# Altium PCB PCB1.PcbDoc
Units mm, origin at the board's own origin, x right, y up, seen from the top; angles counter-clockwise.
Board outline 108.2 x 95.17 mm, 2 copper layers (Top Layer, Bottom Layer); 76 components, 69 nets, 245 pads, 32 vias.
Unrouted connection lines stored in the file: 167.
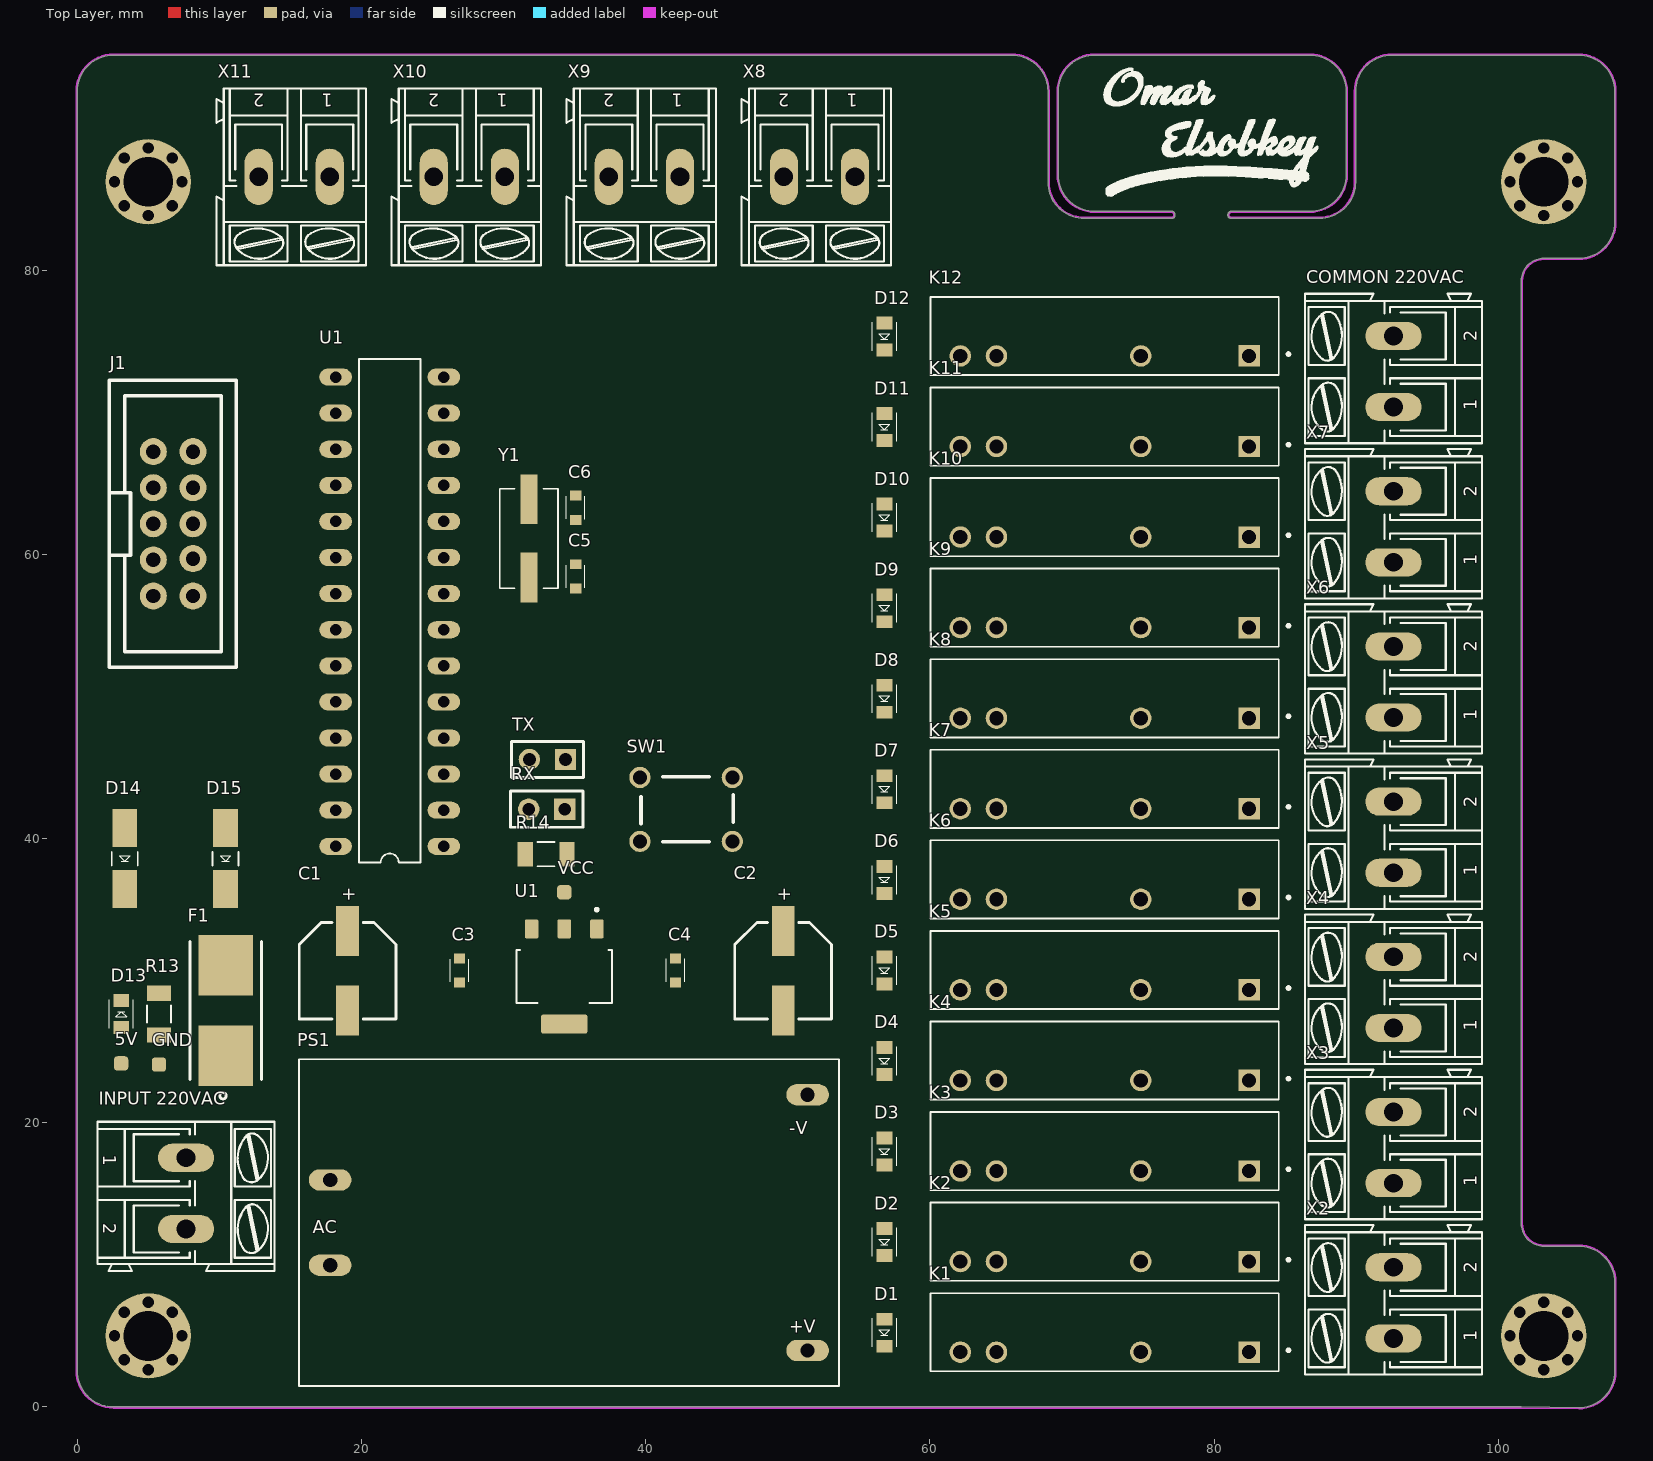
[diagram p0: Top Layer view]
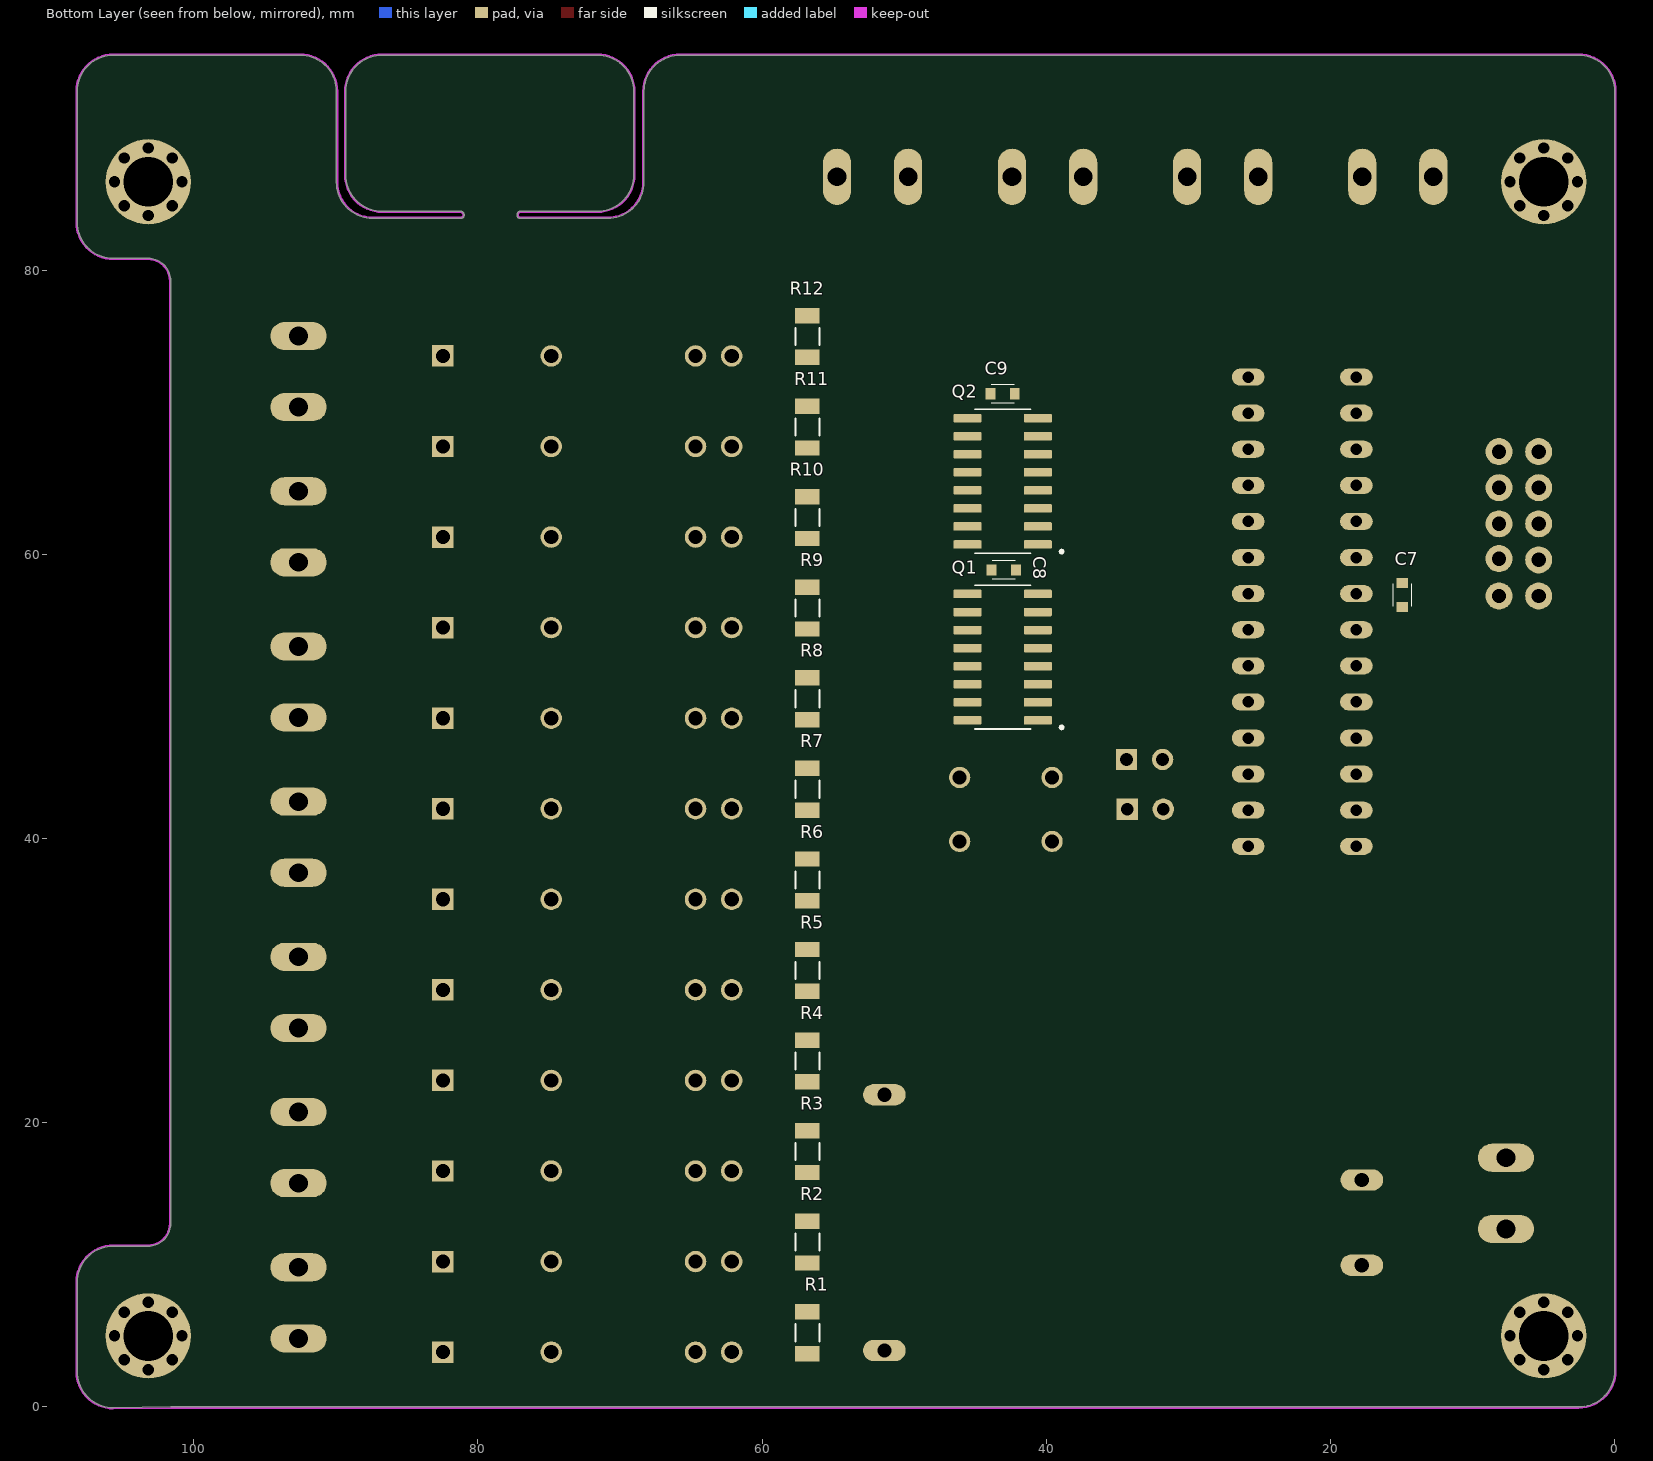
[diagram p1: Bottom Layer view, seen from below]

## Layer stack, top to bottom
Top Solder: solder mask 0.0102, Solder Resist, Dk 3.5
Top Layer: signal copper 0.0356
Dielectric 1: dielectric 0.32, FR-4, Dk 4.8
Bottom Layer: signal copper 0.0356
Bottom Solder: solder mask 0.0102, Solder Resist, Dk 3.5

## Board outline
108.2,83.366 cw(c105.66,83.366) 105.66,80.826 103.2,80.826 ccw(c103.2,79.251) 101.625,79.251 101.625,12.897 ccw(c103.2,12.897) 103.2,11.322 105.66,11.322 cw(c105.66,8.782) 108.2,8.782 108.2,2.49 cw(c105.66,2.49) 105.66,-0.05 101.6,0 2.54,0 cw(c2.54,2.54) 0,2.54 0,92.585 cw(c2.54,92.585) 2.54,95.125 65.777,95.125 cw(c65.777,92.585) 68.317,92.585 68.317,86.19 ccw(c70.857,86.19) 70.857,83.65 77.025,83.65 ccw(c77.025,83.875) 77.25,83.875 77.25,83.9 ccw(c77,83.9) 77,84.15 71.578,84.15 cw(c71.578,86.69) 69.038,86.69 69.038,92.585 cw(c71.578,92.585) 71.578,95.125 86.76,95.125 cw(c86.76,92.585) 89.3,92.585 89.3,86.69 cw(c86.76,86.69) 86.76,84.15 81.25,84.15 ccw(c81.25,83.875) 80.975,83.875 ccw(c81.2,83.875) 81.2,83.65 87.418,83.65 ccw(c87.418,86.19) 89.958,86.19 89.958,92.585 cw(c92.497,92.585) 92.498,95.125 94.08,95.125 105.66,95.125 cw(c105.66,92.585) 108.2,92.585

## Design rules (kind name [scope] priority, off if disabled: settings)
Clearance [All] p1: gap=0.254 ignorepadtopadclearanceinfootprint=FALSE except(0.381: Arc-THPad Track-THPad; 0.508: Arc-Arc Arc-Track Track-Track)
PolygonConnect [All] p1: connectstyle=Relief reliefconductorwidth=0.254 reliefentries=4 polygonreliefangle="90 Angle" airgapwidth=0.254
RoutingVias [All] p1: holewidth=0.61 width=0.859 viastyle="Through Hole" minholewidth=0.61 minwidth=0.859 maxholewidth=0.8 maxwidth=0.859
SolderMaskExpansion [All] p1: expansion=0.102 istentingtop=FALSE
Width [All] p1: maxlimit=0.813 minlimit=0.406 preferedwidth=0.406 minimp=50.000000 maximp=50.000000 favimp=50.000000
30 further rules are at their usual default settings.

## Components (designator, comment, footprint, x,y, rotation, side; value= is the part's Value field where it differs from the comment)
5V "TEST POINT" "Test point" 3.088,24.175 r90 top
C1 "Electrolyt Cap" D6.3H7.7 19.025,30.696 r90 top
C2 "Electrolyt Cap" D6.3H7.7 49.675,30.696 r90 top
C3 "Ceramic Cap" 0603_WAVE 26.9,30.725 r90 top
C4 "Ceramic Cap" 0603_WAVE 42.1,30.725 r270 top
C5 "Ceramic Cap" 0603_WAVE 35.081,58.453 r90 top
C6 "Ceramic Cap" 0603_WAVE 35.081,63.279 r270 top
C7 "Ceramic Cap" 0603_WAVE 14.95,57.15 r90 bottom
C8 "Ceramic Cap" 0603_WAVE 43,58.9 r0 bottom
C9 "Ceramic Cap" 0603_WAVE 43.075,71.3 r0 bottom
"COMMON 220VAC" "AK300/2" AK300/2 92.627,75.364 r90 top
D1 "1.5mW/sr, 1.4V" 0805_L2W1.3H0.8 56.813,5.228 r90 top
D2 "1.5mW/sr, 1.4V" 0805_L2W1.3H0.8 56.813,11.601 r90 top
D3 "1.5mW/sr, 1.4V" 0805_L2W1.3H0.8 56.813,17.974 r90 top
D4 "1.5mW/sr, 1.4V" 0805_L2W1.3H0.8 56.813,24.348 r90 top
D5 "1.5mW/sr, 1.4V" 0805_L2W1.3H0.8 56.813,30.721 r90 top
D6 "1.5mW/sr, 1.4V" 0805_L2W1.3H0.8 56.813,37.094 r90 top
D7 "1.5mW/sr, 1.4V" 0805_L2W1.3H0.8 56.813,43.467 r90 top
D8 "1.5mW/sr, 1.4V" 0805_L2W1.3H0.8 56.813,49.84 r90 top
D9 "1.5mW/sr, 1.4V" 0805_L2W1.3H0.8 56.813,56.213 r90 top
D10 "1.5mW/sr, 1.4V" 0805_L2W1.3H0.8 56.813,62.586 r90 top
D11 "1.5mW/sr, 1.4V" 0805_L2W1.3H0.8 56.813,68.959 r90 top
D12 "1.5mW/sr, 1.4V" 0805_L2W1.3H0.8 56.813,75.332 r90 top
D13 "1.5mW/sr, 1.4V" 0805_L2W1.3H0.8 3.088,27.646 r270 top
D14 "M7 Diode" SMA 3.341,38.596 r270 top
D15 "M7 Diode" SMA 10.435,38.596 r270 top
F1 "Fuse" FUSE 10.454,27.9 r90 top
GND "TEST POINT" "Test point" 5.755,24.1 r90 top
"INPUT 220VAC" "AK300/2" AK300/2 7.66,12.533 r270 top
J1 "SPI" idc10 6.75,62.15 r0 top
K1 "Solid State SPST" "SOLID STATE SPST" 72.307,5.26 r180 top
K2 "Solid State SPST" "SOLID STATE SPST" 72.307,11.633 r180 top
K3 "Solid State SPST" "SOLID STATE SPST" 72.307,18.006 r180 top
K4 "Solid State SPST" "SOLID STATE SPST" 72.307,24.379 r180 top
K5 "Solid State SPST" "SOLID STATE SPST" 72.307,30.752 r180 top
K6 "Solid State SPST" "SOLID STATE SPST" 72.307,37.125 r180 top
K7 "Solid State SPST" "SOLID STATE SPST" 72.307,43.499 r180 top
K8 "Solid State SPST" "SOLID STATE SPST" 72.307,49.872 r180 top
K9 "Solid State SPST" "SOLID STATE SPST" 72.307,56.245 r180 top
K10 "Solid State SPST" "SOLID STATE SPST" 72.307,62.618 r180 top
K11 "Solid State SPST" "SOLID STATE SPST" 72.307,68.991 r180 top
K12 "Solid State SPST" "SOLID STATE SPST" 72.307,75.364 r180 top
PS1 "HLK-5M05" HLK-5M05 34.6,12.975 r0 top
Q1 "ULN2003AD" SOIC127P600X175-16N 43.075,52.767 r0 bottom
Q2 "ULN2003AD" SOIC127P600X175-16N 43.075,65.14 r0 bottom
R1 "1206 Res" 1206 56.813,5.228 r270 bottom value=1k
R2 "1206 Res" 1206 56.813,11.601 r270 bottom value=1k
R3 "1206 Res" 1206 56.813,17.974 r270 bottom value=1k
R4 "1206 Res" 1206 56.813,24.348 r270 bottom value=1k
R5 "1206 Res" 1206 56.813,30.721 r270 bottom value=1k
R6 "1206 Res" 1206 56.813,37.094 r270 bottom value=1k
R7 "1206 Res" 1206 56.813,43.467 r270 bottom value=1k
R8 "1206 Res" 1206 56.813,49.84 r270 bottom value=1k
R9 "1206 Res" 1206 56.813,56.213 r270 bottom value=1k
R10 "1206 Res" 1206 56.813,62.586 r270 bottom value=1k
R11 "1206 Res" 1206 56.813,68.959 r270 bottom value=1k
R12 "1206 Res" 1206 56.813,75.332 r270 bottom value=1k
R13 "1206 Res" 1206 5.755,27.646 r270 top value=1k
R14 "1206 Res" 1206 33,38.9 r0 top value=10k
RX "Header 2" HDR1X2 34.311,42.067 r180 top
SW1 "6x4mm Pb" "6X4MM PB" 42.85,42.05 r0 top
TX "Header 2" HDR1X2 34.361,45.567 r180 top
U1 "AMS1117" SOT229P700X180-4N 34.273,30.295 r270 top
U1 "ATMEGA328P-PN" DIL28 21.99,55.965 r180 top
VCC "TEST POINT" "Test point" 34.273,36.225 r90 top
X2 "AK300/2" AK300/2 92.627,9.832 r90 top
X3 "AK300/2" AK300/2 92.627,20.754 r90 top
X4 "AK300/2" AK300/2 92.627,31.676 r90 top
X5 "AK300/2" AK300/2 92.627,42.598 r90 top
X6 "AK300/2" AK300/2 92.627,53.52 r90 top
X7 "AK300/2" AK300/2 92.627,64.442 r90 top
X8 "AK300/2" AK300/2 49.727,86.568 r180 top
X9 "AK300/2" AK300/2 37.408,86.568 r180 top
X10 "AK300/2" AK300/2 25.089,86.568 r180 top
X11 "AK300/2" AK300/2 12.77,86.568 r180 top
Y1 "ECS-160-20-3X-TR" XTAL_ECS-160-20-3X-TR 31.779,61.12 r270 top

## Footprints (in the part's own frame and the unit in brackets; to place one, negate y for a bottom-side part, rotate by r counter-clockwise, add the part's x,y. Pads: shape width x height; smd on the part's side, far side on the other; paste and mask are expansions set on the pad)
"6X4MM PB" [mm]
  round 1.498 hole 0.99: 1(-3.25,2.25) 2(3.25,2.25) 3(-3.25,-2.25) 4(3.25,-2.25)
  silkscreen extent -3.17,-2.27 3.3,2.29, body extent -3.9,-3 3.9,3, height 17.01
0603_WAVE [mm] "Ceramic Capacitors, 0603, body 1.6x0.8mm"
  rect 0.7x0.8 smd: 1(-0.85,0) 2(0.85,0)
  silkscreen extent -0.81,-0.65 0.8,0.65, body extent -0.8,-0.4 0.8,0.4, height 0.8
0805_L2W1.3H0.8 [mm] "SMT Infrared Chip LED Waterclear, body 2x1.3mm"
  rect 0.9x1.1 smd: 1(-0.95,0) 2(0.95,0)
  silkscreen extent -1,-0.85 1,0.85, body extent -1,-0.65 1,0.65, height 0.8
1206 [mm]
  rect 1.08x1.72 smd: 1(-1.47,0) 2(1.47,0)
  silkscreen extent -0.61,-0.85 0.61,0.85, body extent -1.6,-0.8 1.6,0.8, height 0.71
AK300/2 [mil]
  oval 78x156 hole 52: 1(-197,0) 2(0,0)
  silkscreen extent -297,-245 117,245, body extent -319,-157 98,197, height 496
D6.3H7.7 [mm] "Aluminium Electrolytic V-Chip SMT Capacitors, 6.3x7.7mm"
  rect 3.5x1.6 smd: 1(2.8,0) 2(-2.8,0)
  silkscreen extent -3.4,-3.4 3.4,3.4, body extent -3.65,-3.3 3.65,3.3, height 7.7
DIL28 [mm]
  oval 2.3x1.2 hole 0.813: 1(-3.81,16.51) 2(-3.81,13.97) 3(-3.81,11.43) 4(-3.81,8.89) 5(-3.81,6.35) 6(-3.81,3.81) 7(-3.81,1.27) 8(-3.81,-1.27) 9(-3.81,-3.81) 10(-3.81,-6.35) 11(-3.81,-8.89) 12(-3.81,-11.43) 13(-3.81,-13.97) 14(-3.81,-16.51) 15(3.81,-16.51) 16(3.81,-13.97) 17(3.81,-11.43) 18(3.81,-8.89) 19(3.81,-6.35) 20(3.81,-3.81) 21(3.81,-1.27) 22(3.81,1.27) 23(3.81,3.81) 24(3.81,6.35) 25(3.81,8.89) 26(3.81,11.43) 27(3.81,13.97) 28(3.81,16.51)
  silkscreen extent -2.16,-17.78 2.16,17.65, body extent -3.81,-17.75 4.06,17.65, height 5.2
FUSE [mm]
  rect 4.24x3.81 smd: 1(-3.19,0) 2(3.19,0)
  silkscreen extent -6.22,-2.51 4.86,2.51, body extent -4.86,-2.64 4.87,2.39, height 3.81
HDR1X2 [mm] "Connector; Header; 2 Position"
  rect 1.5x1.5 hole 0.9: 1(0,0)
  round 1.5 hole 0.9: 2(2.54,0)
  silkscreen extent -1.27,-1.27 3.81,1.27
HLK-5M05 [mm]
  oval 3x1.5 hole 1: 1(-16.8,3) 2(-16.8,-3) 3(16.8,9) 4(16.8,-9)
  silkscreen extent -19,-11.5 19,11.5, body extent -19,-11.5 19,11.5, height 18
idc10 [mm]
  round 1.9 hole 1.016 unplated: 1(-1.397,5.08) 2(1.397,5.08) 3(-1.397,2.54) 4(1.397,2.54) 5(-1.397,0) 6(1.397,0) 7(-1.397,-2.54) 8(1.397,-2.45) 9(-1.397,-5.08) 10(1.397,-5.08)
  silkscreen extent -4.5,-10.1 4.45,10.1, body extent -4.57,-10.1 4.43,10.1, height 10
SMA [mm]
  rect 2.65x1.75 smd: ANNODE(-2.15,0) CATHODE(2.15,0)
  silkscreen extent -0.48,-0.91 0.48,0.91, body extent -2.6,-1.36 2.6,1.36, height 2.7
SOIC127P600X175-16N [mm]
  rrect25% 1.97x0.6 smd: 1(-2.475,4.445) 2(-2.475,3.175) 3(-2.475,1.905) 4(-2.475,0.635) 5(-2.475,-0.635) 6(-2.475,-1.905) 7(-2.475,-3.175) 8(-2.475,-4.445) 9(2.475,-4.445) 10(2.475,-3.175) 11(2.475,-1.905) 12(2.475,-0.635) 13(2.475,0.635) 14(2.475,1.905) 15(2.475,3.175) 16(2.475,4.445)
  silkscreen extent -4.24,-5.06 1.95,5.06, body extent -3,-4.95 3,4.95, height 1.75
"SOLID STATE SPST" [mm]
  rect 1.508x1.508 hole 1: 1(-10.16,1.4)
  round 1.508 hole 1: 2(-2.54,1.4) 3(7.62,1.4) 4(10.16,1.4)
  silkscreen extent -13.03,-2.75 12.25,2.75, body extent -12.31,-2.62 12.19,2.88, height 20.5
SOT229P700X180-4N [mm]
  rrect15% 1.31x0.93 smd: 1(-3.345,2.29) 2(-3.345,0) 3(-3.345,-2.29)
  rrect15% 1.31x3.24 smd: 4(3.345,0)
  silkscreen extent -4.8,-3.36 1.86,3.36, body extent -3.5,-3.25 3.5,3.25, height 1.75
"Test point" [mil]
  rrect50% 40x40 smd: TP(0,0)
XTAL_ECS-160-20-3X-TR [mm]
  rect 3.5x1.2 smd: 1(-2.75,0) 2(2.75,0)
  silkscreen extent -3.5,-2.05 3.5,2.05, body extent -3.82,-2.07 3.78,2.03, height 2.3

## Part data
C1 C2: "WCAP-ASLI Aluminum Electrolytic Capacitor, V-Chip, SMT, D16xH17mm", Capacitance=47uF, Capacitance Tolerance=+/-20%, Leakage Current=428.4uA, Manufacturer="Wurth Elektronik", Manufacturer Part Number=865080163018, Operating Temperature="-55 to +105degC", Rated Voltage=25VDC, Ripple Current=1250mA, ComponentLink1Description=Manufacturer, ComponentLink1URL=http://www.we-online.de, ComponentLink2Description=Datasheet, ComponentLink2URL=https://www.we-online.com/catalog/datasheet/865080163018.pdf, Diameter=16mm, Dissipation Factor=24%, Endurance=2000h, Height=17mm, Mounting Technology=SMT, Packaging="Tape and Reel", Published Date="October 2020", Technical Reference=ASEK170682M6R3DVCTHB000
C3 C4 C7 C8 C9: "WCAP-CSGP Multilayer Ceramic Chip Capacitor, General Purpose, size 1812, X7R", Capacitance=100nF, Capacitance Tolerance=+/-10%, Isolation Resistance=>=10GOhm, Manufacturer="Wurth Elektronik", Manufacturer Part Number=885012210019, Operating Temperature="-55 to +125degC", Rated Voltage=50VDC, Ceramic Type=X7R, ComponentLink1Description=Manufacturer, ComponentLink1URL=http://www.we-online.de, ComponentLink2Description=Datasheet, ComponentLink2URL=https://www.we-online.com/catalog/datasheet/885012210019.pdf, Dissipation Factor=#NAME?, Height=1.25mm, Mounting Technology=SMT, Packaging="Tape and Reel", Published Date="May 2020", Size=1812, Technical Reference=X7R1812103K050DFCT10000
C5 C6: "WCAP-CSGP Multilayer Ceramic Chip Capacitor, General Purpose, size 1812, X7R", Capacitance=22pF, Capacitance Tolerance=+/-10%, Isolation Resistance=>=10GOhm, Manufacturer="Wurth Elektronik", Manufacturer Part Number=885012210019, Operating Temperature="-55 to +125degC", Rated Voltage=50VDC, Ceramic Type=X7R, ComponentLink1Description=Manufacturer, ComponentLink1URL=http://www.we-online.de, ComponentLink2Description=Datasheet, ComponentLink2URL=https://www.we-online.com/catalog/datasheet/885012210019.pdf, Dissipation Factor=#NAME?, Height=1.25mm, Mounting Technology=SMT, Packaging="Tape and Reel", Published Date="May 2020", Size=1812, Technical Reference=X7R1812103K050DFCT10000
"COMMON 220VAC" "INPUT 220VAC" X2 X3 X4 X5 X6 X7 X8 X9 X10 X11: Package=None, Availability=Unavailable, Check_prices=https://www.snapeda.com/parts/AK300/3/Altech/view-part/2748485/?ref=eda, MF=Altech, MP=AK300/3, Price=None, SnapEDA_Link=https://www.snapeda.com/parts/AK300/3/Altech/view-part/2748485/?ref=snap
D1 D2 D3 D4 D5 D6 D7 D8 D9 D10 D11 D12 D13: library part "0805 Led", "WL-SICW SMT Chip LED Infrared Waterclear, size 0805, 1.5mW/sr, 1.4V", Emitting Color=Infrared, Forward Voltage max.=2V, Forward Voltage typ.=1.4V, Manufacturer="Wurth Elektronik", Manufacturer Part Number=15408085BA400, Operating Temperature="-40 to +85degC", Centroid Wavelength typ.=845nm, Chip Technology=AlGaAs, ComponentLink1Description=Manufacturer, ComponentLink1URL=http://www.we-online.de, ComponentLink2Description=Datasheet, ComponentLink2URL=https://www.we-online.com/catalog/datasheet/15408085BA400.pdf, Mounting Technology=SMT, Packaging="Tape and Reel", Peak Wavelength typ.=850nm, Published Date="August 2020", Radiant Intensity min.=0.6mW/sr, Radiant Intensity typ.=1.5mW/sr, Size=0805, Viewing Angle=140deg
D14 D15: "Diode Standard 400V 1A Surface Mount SMA _DO-214AC_", Package="DO-214AC ON Semiconductor", Availability=Unavailable, MF="ON Semiconductor", MP=S1G, Price=None, SnapEDA_Link=https://www.snapeda.com/parts/S1G/ON%20Semiconductor/view-part/1474196/?ref=snap
F1: "4A 125V AC 125V DC Fuse Board Mount _Cartridge Style Excluded_ Holder, Surface Mount 2-SMD, Square End Block with Holder", Package="SMD-2 Littelfuse", Digi-Key_Part_Number=F1227CT-ND, Digi-Key_Purchase_URL=https://www.digikey.com/product-detail/en/littelfuse-inc/0154004.DR/F1227CT-ND/183376?utm_source=snapeda&utm_medium=aggregator&utm_campaign=symbol, MF="Littelfuse Inc.", MP=0154004.DR, SnapEDA_Link=https://www.snapeda.com/parts/0154004.DR/Littelfuse%20Inc./view-part/1215896/?ref=snap
K1 K2 K3 K4 K5 K6 K7 K8 K9 K10 K11 K12: "Solid State SPST-NO (1 Form A) 4-SIP", Package="SIP-4 Omron", Availability=Unavailable, MF="Omron Automation", MP="G3MB-202P DC5", Price=None, SnapEDA_Link=https://www.snapeda.com/parts/G3MB-202P%20DC5/Omron%20Automation%20and%20Safety/view-part/914581/?ref=snap
PS1: "AC DC 220V to 5V 5W 5Watt Isolated Switching Step-Down Power Supply Module Converter", Package="Package Analog Devices", Availability=Unavailable, MF=Hi-link, MP=HLK-5M05, Price=None, SnapEDA_Link=https://www.snapeda.com/parts/HLK-5M05/Hi-link/view-part/2758659/?ref=snap
Q1 Q2: "High-Voltage, High-Current Darlington Transistor Arrays", Package="SOIC-16 Texas Instruments", Arrow_Electronics-Purchase-URL=https://snapeda.com/shop?store=Arrow+Electronics&id=152260, Availability=Unavailable, DigiKey-Purchase-URL=https://snapeda.com/shop?store=DigiKey&id=152260, MF="Texas Instruments", Mouser-Purchase-URL=https://snapeda.com/shop?store=Mouser&id=152260, MP=ULN2003AD, Price=None, SnapEDA_Link=https://www.snapeda.com/parts/ULN2003AD/Texas%20Instruments/view-part/152260/?ref=snap
R1 R2 R3 R4 R5 R6 R7 R8 R9 R10 R11 R12 R13 R14: "Res 1206 10 Ohm 5% 1/8W Â±500ppm/Â°C Molded SMD SMD T/R", Package=1206, Power_Rating=".125 W", Resistance=10, Tolerance=5%, Availability=Warning, DigiKey-Purchase-URL=https://snapeda.com/shop?store=DigiKey&id=988597, EU_RoHS_Compliance="Compliant with Exemptions", MF="TE Connectivity", Mouser-Purchase-URL=https://snapeda.com/shop?store=Mouser&id=988597, MP=FCR1206J10R, Price=None, SnapEDA_Link=https://www.snapeda.com/parts/FCR1206J10R/TE%20Connectivity%20Passive%20Product/view-part/988597/?ref=snap
RX TX: "Header, 2-Pin", LatestRevisionDate=17-Jul-2002, LatestRevisionNote="Re-released for DXP Platform.", Publisher="Altium Limited"
SW1: "Switch Push Button OFF _ON_ SPST Round Button 0.05A 24VDC Momentary Contact PC Pins Thru-Hole", Package=None, Availability=Unavailable, EU_RoHS_Compliance=Compliant, MF="TE Connectivity", MP=3-1825910-1, Price=None, SnapEDA_Link=https://www.snapeda.com/parts/3-1825910-1/TE%20Connectivity%20ALCOSWITCH%20Switches/view-part/452461/?ref=snap, TE_purchase_URL=https://www.te.com/usa-en/product-3-1825910-1.html?te_bu=Cor&te_type=disp&te_campaign=seda_glo_cor-seda-global-disp-prtnr-fy19-seda-model-bom-cta_sma-317_1&elqCampaignId=32493
U1: "UNO PLUS Arduino R3 Shield, Xbee Arduino IDE Wheeled Robotics Kit", Package="SOT-223 Seeed Technology", Availability=Unavailable, MF="Seeed Technology", MP=AMS1117, Price=None, SnapEDA_Link=https://www.snapeda.com/parts/AMS1117/Seeed%20Technology%20Co.%2C%20Ltd/view-part/184428/?ref=snap
U1: "AVR AVRÂ® ATmega Microcontroller IC 8-Bit 20MHz 32KB _16K x 16_ FLASH 28-PDIP", Package="PDIP-28 Atmel", Availability=Unavailable, MF=Microchip, MP=ATMEGA328P-PN, Price=None, SnapEDA_Link=https://www.snapeda.com/parts/ATMEGA328P-PN/Microchip/view-part/396640/?ref=snap
Y1: "16MHz Â±30ppm Crystal 20pF 50 Ohms HC-49/US", Package="HC49/US ECS International", Digi-Key_Part_Number=XC1776CT-ND, Digi-Key_Purchase_URL=https://www.digikey.com/product-detail/en/ecs-inc/ECS-160-20-3X-TR/XC1776CT-ND/2676640?utm_source=snapeda&utm_medium=aggregator&utm_campaign=symbol, MF="ECS Inc.", MP=ECS-160-20-3X-TR, SnapEDA_Link=https://www.snapeda.com/parts/ECS-160-20-3X-TR/ECS%20Inc./view-part/561589/?ref=snap

## Free pads (board coordinates)
  round 6 hole 3.5 unplated: 1(5,5) 1(5,86.217) 1(103.2,5) 1(103.2,86.217)

## Via types
v1: diameter 0.859, hole 0.8, Top Layer to Bottom Layer, 32 vias

## Nets (pads, with @x,y where several pads share a name; then routed paths per layer and width w, separated by ;. In a path a pad name is that pad's centre, name@x,y a point inside that pad or via, vN(x,y) a via of type N, cw(c..) or ccw(c..) an arc to the next point about the centre after c; other vN are vias at no path point)
0: RX.1 U1.2@25.8,41.995
1: TX.1 U1.3@25.8,44.535
2: Q1.3 U1.4@25.8,47.075
3: Q1.4 U1.5
4: Q1.5 U1.6
5: Q1.6 U1.11
6: Q1.7 U1.12
7: U1.13 X11.2
8: U1.14 X11.1
9: Q2.1 U1.15
10: Q2.2 U1.16
11: J1.1 Q2.3 U1.17
12: J1.9 Q2.4 U1.18
13: J1.7 Q2.5 U1.19
+5: 5V.TP C1.1 C3.2 C8.2 C9.2 D14.CATHODE D15.CATHODE F1.2 K1.3 K2.3 K3.3 K4.3 K5.3 K6.3 K7.3 K8.3 K9.3 K10.3 K11.3 K12.3 Q1.9 Q2.9 R1.2 R2.2 R3.2 R4.2 R5.2 R6.2 R7.2 R8.2 R9.2 R10.2 R11.2 R12.2 R13.1 U1.3@31.983,33.64 X8.2
A0: U1.23 X9.2
A1: U1.24 X9.1
A2: U1.25
A3: U1.26
A4: U1.27 X10.2
A5: U1.28 X10.1
COMMON: "COMMON 220VAC.1" "COMMON 220VAC.2" K1.2 K2.2 K3.2 K4.2 K5.2 K6.2 K7.2 K8.2 K9.2 K10.2 K11.2 K12.2
GND: C1.2 C2.2 C3.1 C4.1 C5.2 C6.2 C7.1 C8.1 C9.1 D13.1 D14.ANNODE D15.ANNODE GND.TP J1.4 J1.6 J1.8 J1.10 pad.1@5,5 PS1.3 Q1.8 Q2.8 SW1.1 SW1.2 U1.1@36.563,33.64 U1.8 U1.22 X8.1
  other v1: 5,2.625 3.321,3.321 6.679,3.321 2.625,5 7.375,5 3.321,6.679 6.679,6.679 5,7.375
K1: K1.1 X2.1
K2: K2.1 X2.2
K3: K3.1 X3.1
K4: K4.1 X3.2
K5: K5.1 X4.1
K6: K6.1 X4.2
K7: K7.1 X5.1
K8: K8.1 X5.2
K9: K9.1 X6.1
K10: K10.1 X6.2
K11: K11.1 X7.1
K12: K12.1 X7.2
NetD1_2: D1.2 R1.1
NetD2_2: D2.2 R2.1
NetD3_2: D3.2 R3.1
NetD4_2: D4.2 R4.1
NetD5_2: D5.2 R5.1
NetD6_2: D6.2 R6.1
NetD7_2: D7.2 R7.1
NetD8_2: D8.2 R8.1
NetD9_2: D9.2 R9.1
NetD10_2: D10.2 R10.1
NetD11_2: D11.2 R11.1
NetD12_2: D12.2 R12.1
NetD13_2: D13.2 R13.2
NetF1_1: F1.1 PS1.4
"NetINPUT 220VAC_1": "INPUT 220VAC.1" PS1.1
"NetINPUT 220VAC_2": "INPUT 220VAC.2" PS1.2
R1: D1.1 K1.4 Q1.16
R2: D2.1 K2.4 Q1.15
R3: D3.1 K3.4 Q1.14
R4: D4.1 K4.4 Q1.13
R5: D5.1 K5.4 Q1.12
R6: D6.1 K6.4 Q1.11
R7: D7.1 K7.4 Q1.10
R8: D8.1 K8.4 Q2.16
R9: D9.1 K9.4 Q2.15
R10: D10.1 K10.4 Q2.14
R11: D11.1 K11.4 Q2.13
R12: D12.1 K12.4 Q2.12
RST: J1.5 R14.1 SW1.3 SW1.4 U1.1@25.8,39.455
RX: Q1.1 RX.2
TX: Q1.2 TX.2
VCC: C2.1 C4.2 C7.2 J1.2 R14.2 U1.2@34.273,33.64 U1.4@34.273,26.95 U1.7 U1.20 VCC.TP
XTAL1: C5.1 U1.9 Y1.2
XTAL2: C6.1 U1.10 Y1.1
pads on no net: J1.3 Q2.6 Q2.7 Q2.10 Q2.11 U1.21
copper on no net:
  other v1: 103.2,2.625 101.52,3.321 104.879,3.321 100.825,5 105.575,5 101.52,6.679 104.879,6.679 103.2,7.375 5,83.842 103.2,83.842 3.321,84.537 6.679,84.537 101.52,84.537 104.879,84.537 2.625,86.217 7.375,86.217 100.825,86.217 105.575,86.217 3.321,87.896 6.679,87.896 101.52,87.896 104.879,87.896 5,88.592 103.2,88.592

## Keep-outs
Keep-Out Layer:
  lines w0.127: 101.599,-0.064 101.6,-0.064 ; -0.064,2.54 ccw(c0,2.54) -0.064,2.539 ; -0.064,2.539 ccw(c2.54,2.54) 2.539,-0.064 ; -0.064,2.54 ccw(c2.54,2.54) -0.064,2.539 ; -0.064,2.54 -0.064,92.585 ; -0.064,92.586 ccw(c2.54,92.585) -0.064,92.585 ; -0.064,92.586 cw(c2.54,92.585) 2.539,95.189 ; -0.064,92.586 ccw(c0,92.585) -0.064,92.585 ; 2.539,-0.064 ccw(c2.54,2.54) 2.54,-0.064 ; 2.539,-0.064 ccw(c2.54,0) 2.54,-0.064 ; 2.54,-0.064 101.6,-0.064 ; 2.54,95.189 ccw(c2.54,95.125) 2.539,95.189 ; 2.54,95.189 ccw(c2.54,92.585) 2.539,95.189 ; 2.54,95.189 65.777,95.189 ; 65.778,95.189 ccw(c65.777,95.125) 65.777,95.189 ; 65.778,95.189 ccw(c65.777,92.585) 65.777,95.189 ; 65.778,95.189 cw(c65.777,92.585) 68.381,92.586 ; 68.381,86.19 ccw(c68.317,86.19) 68.381,86.19 ; 68.381,86.19 ccw(c70.857,86.19) 70.857,83.714 ; 68.381,86.19 68.381,92.585 ; 68.381,86.19 68.381,86.19 ; 68.381,86.19 68.381,86.19 ; 68.381,92.585 ccw(c65.777,92.585) 68.381,92.586 ; 68.381,92.585 ccw(c68.317,92.585) 68.381,92.586 ; 68.974,86.69 ccw(c71.578,86.69) 71.578,84.086 ; 68.974,86.69 ccw(c69.038,86.69) 68.974,86.69 ; 68.974,86.69 68.974,92.585 ; 68.974,86.69 68.974,86.69 ; 68.974,86.69 68.974,86.69 ; 68.974,92.585 cw(c71.578,92.585) 71.577,95.189 ; 68.974,92.585 68.974,92.585 ; 70.857,83.714 ccw(c70.857,83.65) 70.857,83.714 ; 70.857,83.714 77.025,83.714 ; 70.857,83.714 70.857,83.714 ; 71.578,84.086 ccw(c71.578,84.15) 71.578,84.086 ; 71.578,84.086 76.999,84.086 ; 71.578,84.086 71.578,84.086 ; 71.578,84.086 71.578,84.086 ; 71.578,95.189 ccw(c71.578,95.125) 71.578,95.189 ; 71.578,95.189 ccw(c71.578,95.125) 71.577,95.189 ; 71.578,95.189 ccw(c71.578,92.585) 71.577,95.189 ; 71.578,95.189 86.76,95.189 ; 76.999,84.086 ccw(c77,84.15) 77,84.086 ; 76.999,84.086 77,84.086 ; 77,84.086 cw(c77,83.9) 77.186,83.9 ; 77.025,83.714 ccw(c77.025,83.875) 77.186,83.875 ; 77.025,83.714 ccw(c77.025,83.875) 77.025,83.714 ; 77.025,83.714 ccw(c77.025,83.65) 77.025,83.714 ; 77.025,83.714 ccw(c77.025,83.65) 77.025,83.714 ; 77.025,83.714 77.025,83.714 ; 77.186,83.875 cw(c77.25,83.875) 77.186,83.876 ; 77.186,83.875 ccw(c77.025,83.875) 77.186,83.875 ; 77.186,83.875 77.186,83.876 ; 77.186,83.876 77.186,83.899 ; 77.186,83.9 ccw(c77.25,83.9) 77.186,83.899 ; 77.186,83.9 ccw(c77,83.9) 77.186,83.9 ; 77.186,83.899 77.186,83.9 ; 81.039,83.875 cw(c81.25,83.875) 81.25,84.086 ; 81.039,83.875 ccw(c80.975,83.875) 81.039,83.875 ; 81.039,83.875 ccw(c80.975,83.875) 81.039,83.875 ; 81.039,83.875 ccw(c80.975,83.875) 81.039,83.875 ; 81.039,83.875 ccw(c80.975,83.875) 81.039,83.875 ; 81.039,83.875 ccw(c80.975,83.875) 81.039,83.875 ; 81.039,83.875 ccw(c80.975,83.875) 81.039,83.875 ; 81.039,83.875 ccw(c81.2,83.875) 81.2,83.714 ; 81.2,83.714 ccw(c81.2,83.65) 81.2,83.714 ; 81.2,83.714 ccw(c81.2,83.65) 81.2,83.714 ; 81.2,83.714 ccw(c81.2,83.65) 81.2,83.714 ; 81.2,83.714 ccw(c81.2,83.65) 81.2,83.714 ; 81.2,83.714 ccw(c81.2,83.875) 81.2,83.714 ; 81.2,83.714 87.418,83.714 ; 81.2,83.714 81.2,83.714 ; 81.2,83.714 81.2,83.714 ; 81.25,84.086 ccw(c81.25,84.15) 81.251,84.086 ; 81.25,84.086 81.251,84.086 ; 81.251,84.086 86.76,84.086 ; 86.76,84.086 ccw(c86.76,86.69) 89.363,86.689 ; 86.76,84.086 86.76,84.086 ; 86.76,95.189 ccw(c86.76,95.125) 86.76,95.189 ; 86.76,95.189 ccw(c86.76,92.585) 86.76,95.189 ; 86.76,95.189 cw(c86.76,92.585) 89.363,92.586 ; 87.418,83.714 ccw(c87.418,86.19) 89.894,86.19 ; 87.418,83.714 87.418,83.714 ; 89.363,86.689 ccw(c89.3,86.69) 89.363,86.69 ; 89.363,86.689 ccw(c86.76,86.69) 89.363,86.69 ; 89.363,86.69 ccw(c89.3,86.69) 89.363,86.69 ; 89.363,86.69 89.363,92.585 ; 89.363,92.585 ccw(c89.3,92.585) 89.363,92.586 ; 89.363,92.585 ccw(c89.3,92.585) 89.363,92.585 ; 89.363,92.585 ccw(c86.76,92.585) 89.363,92.586 ; 89.894,86.19 cw(c89.958,86.19) 89.894,86.191 ; 89.894,86.19 89.894,86.191 ; 89.894,86.191 89.894,92.585 ; 89.894,92.585 cw(c92.497,92.585) 92.497,95.189 ; 89.894,92.585 89.894,92.585 ; 92.497,95.189 cw(c92.498,95.125) 92.498,95.189 ; 92.497,95.189 cw(c92.497,92.585) 92.498,95.189 ; 92.498,95.189 ccw(c92.498,95.125) 92.498,95.189 ; 92.498,95.189 94.08,95.189 105.66,95.189 ; 101.6,-0.064 105.659,-0.114 ; 101.6,-0.064 101.6,-0.064 ; 101.689,12.897 ccw(c103.2,12.897) 103.2,11.386 ; 101.689,12.897 ccw(c101.625,12.897) 101.689,12.898 ; 101.689,12.897 101.689,12.898 ; 101.689,12.898 101.689,79.25 ; 101.689,79.251 cw(c103.2,79.251) 103.2,80.762 ; 101.689,79.25 ccw(c101.625,79.251) 101.689,79.251 ; 101.689,79.25 101.689,79.251 ; 103.2,11.386 ccw(c103.2,11.322) 103.2,11.386 ; 103.2,11.386 105.66,11.386 ; 103.2,11.386 103.2,11.386 ; 103.2,80.762 ccw(c103.2,80.826) 103.2,80.762 ; 103.2,80.762 105.66,80.762 ; 103.2,80.762 103.2,80.762 ; 105.659,-0.114 ccw(c105.66,-0.05) 105.66,-0.114 ; 105.659,-0.114 ccw(c105.66,-0.05) 105.66,-0.114 ; 105.659,-0.114 ccw(c105.66,-0.05) 105.659,-0.114 ; 105.659,-0.114 105.659,-0.114 ; 105.659,-0.114 105.659,-0.114 ; 105.66,-0.114 ccw(c105.66,2.49) 108.264,2.489 ; 105.661,11.386 ccw(c105.66,8.782) 105.66,11.386 ; 105.661,11.386 cw(c105.66,8.782) 108.264,8.783 ; 105.661,11.386 ccw(c105.66,11.322) 105.66,11.386 ; 105.661,80.762 ccw(c105.66,83.366) 108.264,83.365 ; 105.66,80.762 ccw(c105.66,83.366) 105.661,80.762 ; 105.66,80.762 ccw(c105.66,80.826) 105.661,80.762 ; 105.661,95.189 ccw(c105.66,95.125) 105.66,95.189 ; 105.661,95.189 ccw(c105.66,92.585) 105.66,95.189 ; 105.661,95.189 cw(c105.66,92.585) 108.264,92.586 ; 108.264,2.489 ccw(c108.2,2.49) 108.264,2.49 ; 108.264,2.489 ccw(c105.66,2.49) 108.264,2.49 ; 108.264,2.49 ccw(c108.2,2.49) 108.264,2.49 ; 108.264,2.49 108.264,8.782 ; 108.264,8.782 ccw(c105.66,8.782) 108.264,8.783 ; 108.264,8.782 ccw(c108.2,8.782) 108.264,8.783 ; 108.264,83.365 ccw(c108.2,83.366) 108.264,83.366 ; 108.264,83.365 ccw(c105.66,83.366) 108.264,83.366 ; 108.264,83.366 108.264,92.585 ; 108.264,92.585 ccw(c105.66,92.585) 108.264,92.586 ; 108.264,92.585 ccw(c108.2,92.585) 108.264,92.586 ; 108.264,92.585 ccw(c108.2,92.585) 108.264,92.585

## Silkscreen, mask and mechanical layers (free items; w line width, h text height)
Top Overlay:
  drawing of 3 lines, arcs and shapes, not listed

## Text inside footprints (layer, text, board x,y; h text height)
C1: Top Overlay "+" at 19.525,35.546 h0.89 r90
C2: Top Overlay "+" at 50.175,35.546 h0.89 r90
"COMMON 220VAC": Top Overlay "1" at 98.469,70.157 h0.89 r90; Top Overlay "2" at 98.469,74.983 h0.89 r90
"INPUT 220VAC": Top Overlay "1" at 1.818,17.74 h0.89 r270; Top Overlay "2" at 1.818,12.914 h0.89 r270
PS1: Top Overlay "AC" at 16.566,12.213 h0.89; Top Overlay "-V" at 50.094,19.198 h0.89; Top Overlay "+V" at 50.094,5.228 h0.89
X2: Top Overlay "2" at 98.469,9.451 h0.89 r90; Top Overlay "1" at 98.469,4.625 h0.89 r90
X3: Top Overlay "2" at 98.469,20.373 h0.89 r90; Top Overlay "1" at 98.469,15.547 h0.89 r90
X4: Top Overlay "2" at 98.469,31.295 h0.89 r90; Top Overlay "1" at 98.469,26.469 h0.89 r90
X5: Top Overlay "2" at 98.469,42.217 h0.89 r90; Top Overlay "1" at 98.469,37.391 h0.89 r90
X6: Top Overlay "2" at 98.469,53.139 h0.89 r90; Top Overlay "1" at 98.469,48.313 h0.89 r90
X7: Top Overlay "2" at 98.469,64.061 h0.89 r90; Top Overlay "1" at 98.469,59.235 h0.89 r90
X8: Top Overlay "2" at 50.108,92.41 h0.89 r180; Top Overlay "1" at 54.934,92.41 h0.89 r180
X9: Top Overlay "2" at 37.789,92.41 h0.89 r180; Top Overlay "1" at 42.615,92.41 h0.89 r180
X10: Top Overlay "2" at 25.47,92.41 h0.89 r180; Top Overlay "1" at 30.296,92.41 h0.89 r180
X11: Top Overlay "2" at 13.151,92.41 h0.89 r180; Top Overlay "1" at 17.977,92.41 h0.89 r180